# Altium PCB LED-Board.PcbDoc
Units mm, origin at the board's own origin, x right, y up, seen from the top; angles counter-clockwise.
Board outline 35 x 23 mm, 2 copper layers (Top Layer, Bottom Layer); 17 components, 17 nets, 44 pads, 0 vias.
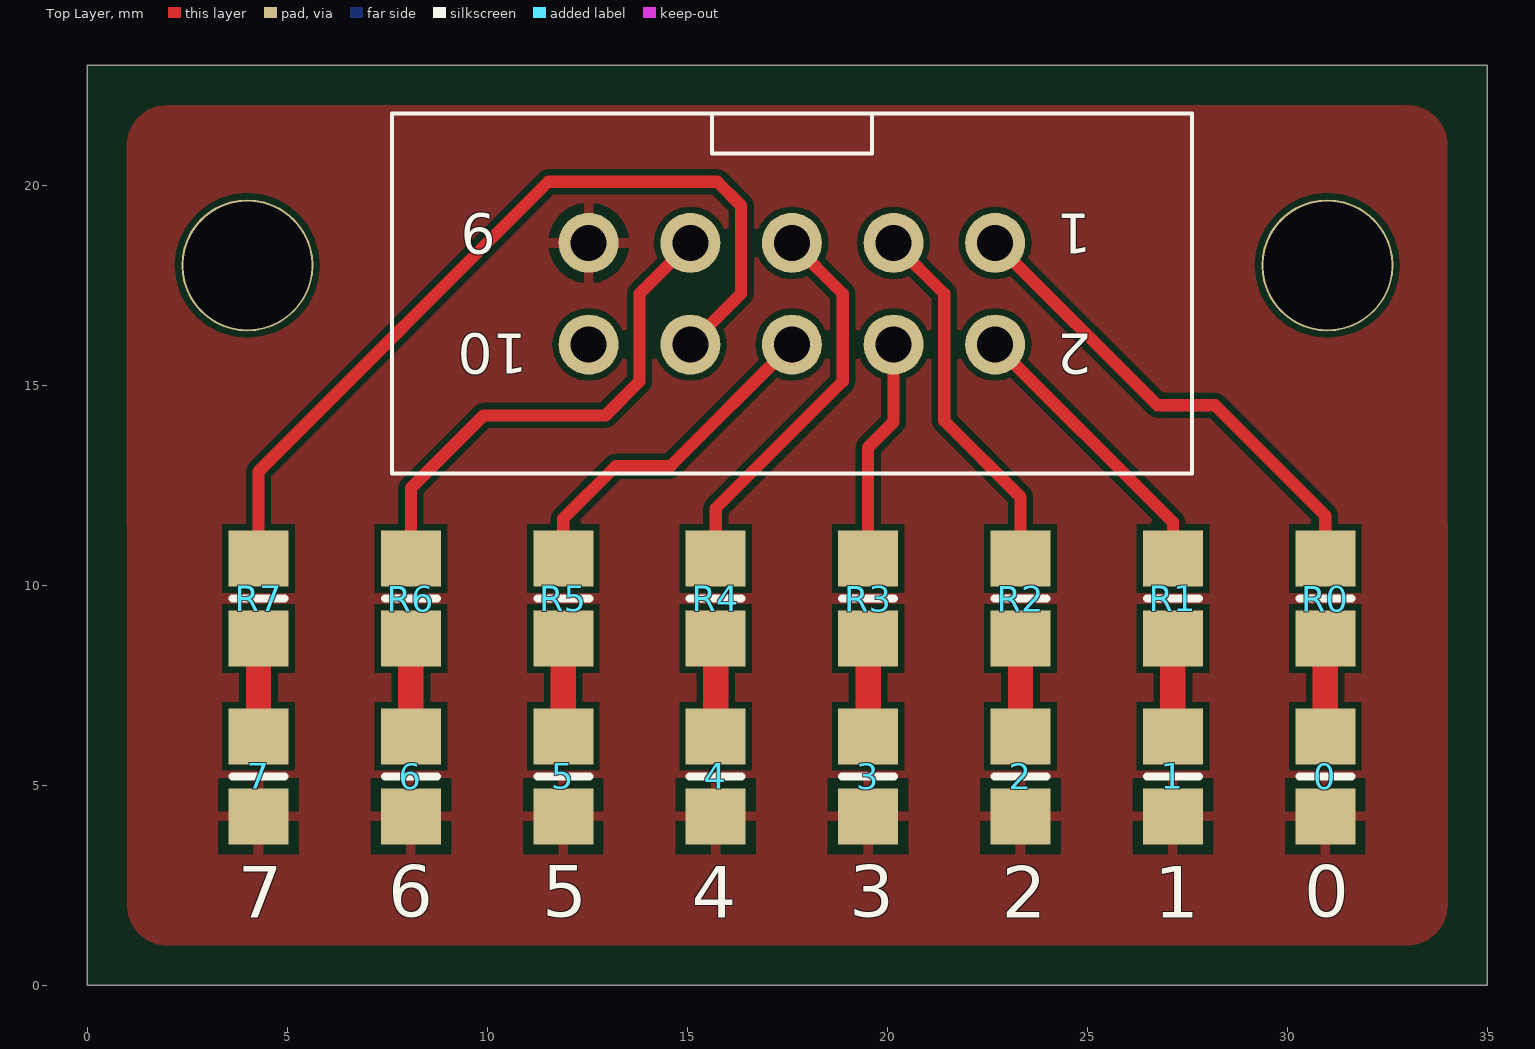
[diagram p0: Top Layer view]
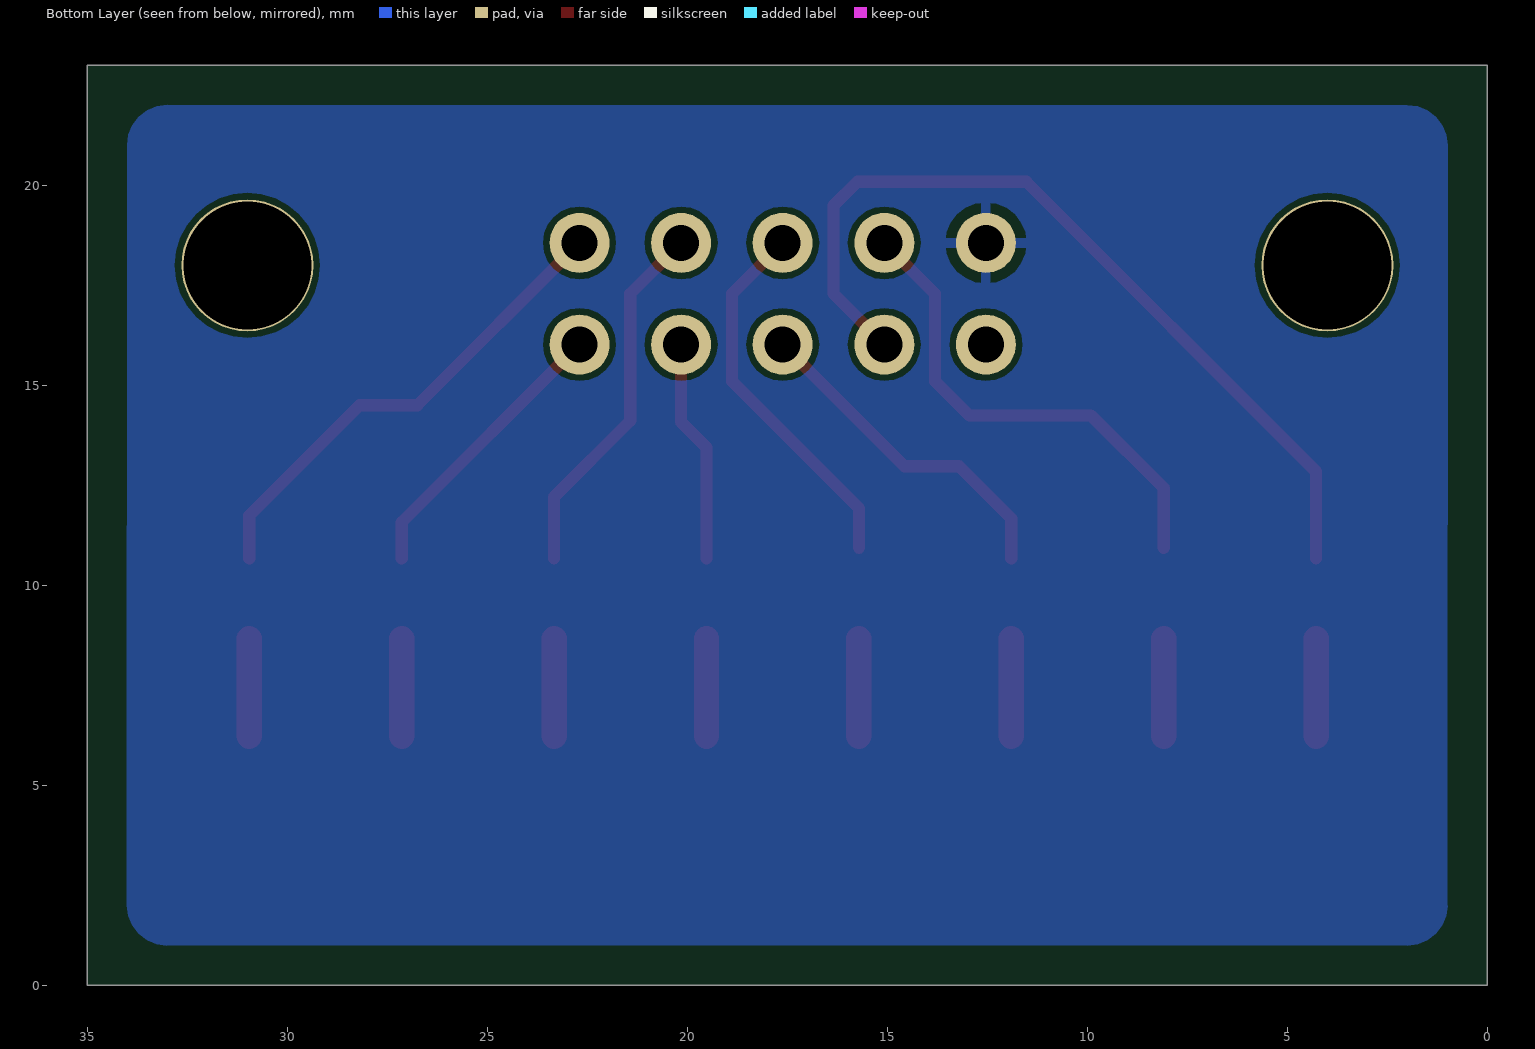
[diagram p1: Bottom Layer view, seen from below]

## Layer stack, top to bottom
Top Layer: signal copper 0.0356
Dielectric: dielectric 0.32, FR-4, Dk 4.8
Bottom Layer: signal copper 0.0356

## Board outline
0,0 35,0 35,23 0,23

## Design rules (kind name [scope] priority, off if disabled: settings)
Clearance [All] p1: gap=0.152
HoleSize [All] p1: absolutevalues=TRUE maxlimit=5 minlimit=0.025 maxpercent=80.000 minpercent=20.000
MinimumSolderMaskSliver [All] p1: minsoldermaskwidth=0.152
PolygonConnect [All] p1: connectstyle=Relief reliefconductorwidth=0.254 reliefentries=4 polygonreliefangle="90 Angle" airgapwidth=0.254
RoutingVias [All] p1: holewidth=0.711 width=1.27 viastyle="Through Hole" minholewidth=0.711 minwidth=1.27 maxholewidth=0.711 maxwidth=1.27
SilkToSilkClearance [All] p1 off: silktosilkclearance=0.152
SilkscreenOverComponentPads [All] p1 off: minsilkscreentomaskgap=0.152
SolderMaskExpansion [All] p1: expansion=0.102
Width [All] p1: maxlimit=2 minlimit=0.152 preferedwidth=0.254
24 further rules are at their usual default settings.

## Components (designator, comment, footprint, x,y, rotation, side; value= is the part's Value field where it differs from the comment)
0 "" 6-0805_M 30.95,5.225 r270 top
1 "" 6-0805_M 27.14,5.225 r270 top
2 "" 6-0805_M 23.33,5.225 r270 top
3 "" 6-0805_M 19.52,5.225 r270 top
4 "" 6-0805_M 15.71,5.225 r270 top
5 "" 6-0805_M 11.9,5.225 r270 top
6 "" 6-0805_M 8.09,5.225 r270 top
7 "" 6-0805_M 4.28,5.225 r270 top
R0 "Res2" 6-0805_M 30.95,9.67 r270 top
R1 "Res2" 6-0805_M 27.14,9.67 r90 top
R2 "Res2" 6-0805_M 23.33,9.67 r270 top
R3 "Res2" 6-0805_M 19.52,9.67 r90 top
R4 "Res2" 6-0805_M 15.71,9.67 r270 top
R5 "Res2" 6-0805_M 11.9,9.67 r90 top
R6 "Res2" 6-0805_M 8.09,9.67 r270 top
R7 "Res2" 6-0805_M 4.28,9.67 r90 top
? "10 pol Header" "10 pol Header" 17.615,17.29 r180 top

## Footprints (in the part's own frame and the unit in brackets; to place one, negate y for a bottom-side part, rotate by r counter-clockwise, add the part's x,y. Pads: shape width x height; smd on the part's side, far side on the other; paste and mask are expansions set on the pad)
6-0805_M [mm] "Chip Resistor, Body 2.0x1.2mm, IPC Low Density"
  rect 1.4x1.5 smd: 1(-1,0) 2(1,0)
  silkscreen extent 0,-0.65 0,0.65, body extent -1.07,-0.7 1.07,0.7, height 0.7
"10 pol Header" [mm]
  round 1.5 hole 0.9: 1(-5.08,-1.27) 2(-5.08,1.27) 3(-2.54,-1.27) 4(-2.54,1.27) 5(0,-1.27) 6(0,1.27) 7(2.54,-1.27) 8(2.54,1.27) 9(5.08,-1.27) 10(5.08,1.27)
  silkscreen extent -10,-4.5 10,4.5, body extent -10,-4.5 10,4.5, height 9

## Part data
0 1 2 3 4 5 6 7: library part LED3, "Typical BLUE SiC LED"
R0 R1 R2 R3 R4 R5 R6 R7: "Resistor"

## Free pads (board coordinates)
  round 3.3 hole 3.2: 0(4,18) 0(31,18)

## Nets (pads, with @x,y where several pads share a name; then routed paths per layer and width w, separated by ;. In a path a pad name is that pad's centre, name@x,y a point inside that pad or via, vN(x,y) a via of type N, cw(c..) or ccw(c..) an arc to the next point about the centre after c; other vN are vias at no path point)
GND: 0.2 1.2 2.2 3.2 4.2 5.2 6.2 7.2 ?.9
Net0_1: 0.1 R0.2 | length 2.4
  Top Layer w0.635: 0.1 R0.2
Net1_1: 1.1 R1.1 | length 2.4
  Top Layer w0.635: 1.1 R1.1
Net2_1: 2.1 R2.2 | length 2.4
  Top Layer w0.635: 2.1 R2.2
Net3_1: 3.1 R3.1 | length 2.4
  Top Layer w0.635: 3.1 R3.1
Net4_1: 4.1 R4.2 | length 2.4
  Top Layer w0.635: 4.1 R4.2
Net5_1: 5.1 R5.1 | length 2.4
  Top Layer w0.635: 5.1 R5.1
Net6_1: 6.1 R6.2 | length 2.4
  Top Layer w0.635: 6.1 R6.2
Net7_1: 7.1 R7.1 | length 2.4
  Top Layer w0.635: 7.1 R7.1
Net_1: ?.1 R0.1 | length 12.2
  Top Layer w0.305: ?.1 26.753,14.502 28.194,14.502 30.95,11.746 R0.1
Net_2: ?.2 R1.2 | length 7.2
  Top Layer w0.305: ?.2 27.14,11.575 R1.2
Net_3: ?.3 R2.1 | length 9.2
  Top Layer w0.305: ?.3 21.425,17.29 21.425,14.115 23.33,12.21 R2.1
Net_4: ?.4 R3.2 | length 5.6
  Top Layer w0.305: R3.2 19.52,13.448 20.155,14.083 ?.4
Net_5: ?.5 R4.1 | length 9.5
  Top Layer w0.305: R4.1@15.71,10.94 15.71,11.924 18.885,15.099 18.885,17.29 ?.5
Net_6: ?.6 R5.2 | length 8.5
  Top Layer w0.305: R5.2 11.9,11.67 13.208,12.978 14.573,12.978 ?.6
Net_7: ?.7 R6.1 | length 12.3
  Top Layer w0.305: R6.1@8.09,10.94 8.09,12.432 9.906,14.248 12.954,14.248 13.805,15.099 13.805,17.29 ?.7
Net_8: ?.8 R7.2 | length 21.5
  Top Layer w0.305: R7.2 4.28,12.845 11.525,20.09 15.748,20.09 16.345,19.493 16.345,17.29 ?.8
pads on no net: ?.10

## Polygon pours and split planes (outlines as drawn)
GND on Top Layer "GND" (solid, remove dead copper, pour order 6): 1,21 cw(c2,21) 2,22 33,22 cw(c33,21) 34,21 34,2 cw(c33,2) 33,1 2,1 cw(c2,2) 1,2
GND on Bottom Layer "GND" (solid, remove dead copper, pour order 8): 1,21 cw(c2,21) 2,22 33,22 cw(c33,21) 34,21 34,2 cw(c33,2) 33,1 2,1 cw(c2,2) 1,2

## Silkscreen, mask and mechanical layers (free items; w line width, h text height)
Top Overlay:
  text "6" at 7.518,1.295 h2.2
  text "5" at 11.379,1.295 h2.2
  text "3" at 19.05,1.295 h2.2
  text "0" at 30.429,1.295 h2.2
  text "7" at 3.759,1.27 h2.2
  text "4" at 15.113,1.27 h2.2
  text "2" at 22.86,1.27 h2.2
  text "1" at 26.67,1.27 h2.2

## Text inside footprints (layer, text, board x,y; h text height)
?: Top Overlay "1" at 25.115,19.29 h1 r180; Top Overlay "2" at 25.115,16.29 h1 r180; Top Overlay "9" at 10.215,19.29 h1 r180; Top Overlay "10" at 11.015,16.29 h1 r180